# Altium PCB CZ201C_V2.0.PcbDoc (part 2 of 2)
Units mm, origin at the board's own origin, x right, y up, seen from the top; angles counter-clockwise.
Board outline 73 x 60 mm, 2 copper layers (Top Layer, Bottom Layer); 64 components, 36 nets, 200 pads, 72 vias.
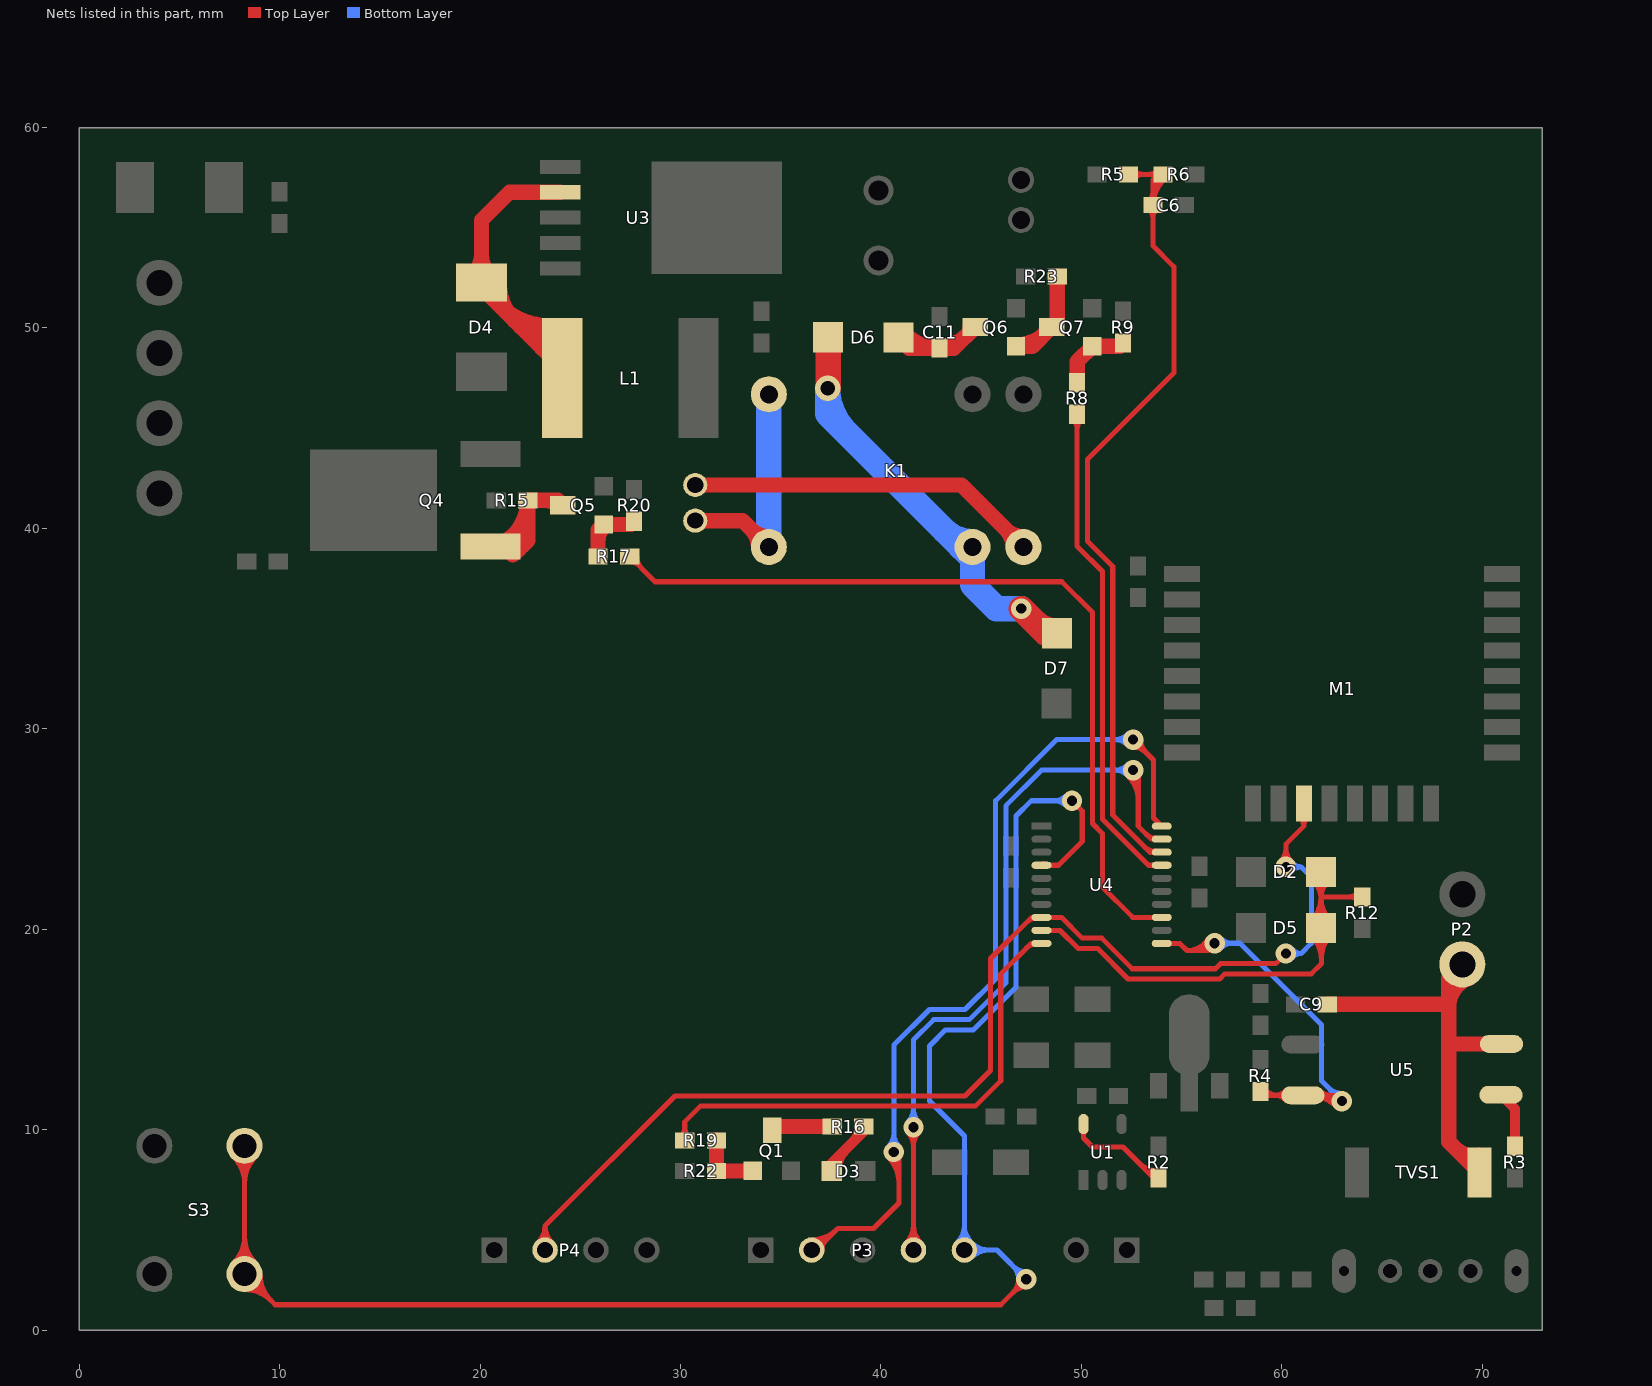
[diagram p2: the nets of this part, all layers, seen from the top]

## Via types
v1: diameter 1.016, hole 0.508, Top Layer to Bottom Layer, 69 vias
v2: diameter 1.27, hole 0.711, Top Layer to Bottom Layer, 3 vias

## Nets (pads, with @x,y where several pads share a name; then routed paths per layer and width w, separated by ;. In a path a pad name is that pad's centre, name@x,y a point inside that pad or via, vN(x,y) a via of type N, cw(c..) or ccw(c..) an arc to the next point about the centre after c; other vN are vias at no path point) (continued)
LED1: R19.2 U4.10 | length 30.9
  Top Layer w0.254: R19.2@30.21,9.472 30.21,10.398 30.988,11.176 44.704,11.176 45.974,12.446 45.974,17.78 47.49,19.296 U4.10@48.006,19.296 ; R19.2@30.017,9.665 ccw(c29.551,10.131) 30.21,10.131 ; R19.2@30.017,9.665 ccw(c29.551,10.131) 30.21,10.131 ; R19.2@30.017,9.665 ccw(c29.551,10.131) 30.21,10.131 ; 30.21,10.131 ccw(c30.869,10.131) R19.2@30.403,9.665 ; 30.21,10.131 ccw(c30.869,10.131) R19.2@30.403,9.665 ; 30.21,10.131 ccw(c30.869,10.131) R19.2@30.403,9.665 ; 47.273,19.079 cw(c47.681,18.671) U4.10@47.681,19.248 ; 47.273,19.079 cw(c47.681,18.671) U4.10@47.681,19.248 ; 47.273,19.079 cw(c47.681,18.671) U4.10@47.681,19.248 ; 47.395,19.201 cw(c47.566,19.029) U4.10@47.662,19.252 ; 47.395,19.201 cw(c47.566,19.029) U4.10@47.662,19.252 ; 47.395,19.201 cw(c47.566,19.029) U4.10@47.662,19.252
LIGHT_CTR: R17.1 U4.13 | length 44.9
  Top Layer w0.254: R17.1@27.46,38.608 28.73,37.338 49.022,37.338 50.546,35.814 50.546,25.277 51.054,24.769 51.054,22.098 52.556,20.596 U4.13@54.006,20.596 U4.13@53.984,20.574 ; R17.1@27.54,38.335 cw(c27.54,37.869) 27.869,38.199 ; R17.1@27.54,38.335 cw(c27.54,37.869) 27.869,38.199 ; R17.1@27.54,38.335 cw(c27.54,37.869) 27.869,38.199 ; R17.1@27.813,38.608 ccw(c28.665,38.608) 28.063,38.005 ; R17.1@27.813,38.608 ccw(c28.665,38.608) 28.063,38.005 ; R17.1@27.813,38.608 ccw(c28.665,38.608) 28.063,38.005
LOCK_CTR: R8.2 U4.17 | length 27.7
  Top Layer w0.254: R8.2@49.784,45.692 49.784,39.116 51.054,37.846 51.054,25.487 53.345,23.196 U4.17@54.006,23.196 ; R8.2@49.591,45.419 cw(c49.125,44.953) 49.784,44.953 ; R8.2@49.591,45.419 cw(c49.125,44.953) 49.784,44.953 ; R8.2@49.591,45.419 cw(c49.125,44.953) 49.784,44.953 ; 49.784,44.953 cw(c50.443,44.953) R8.2@49.977,45.419 ; 49.784,44.953 cw(c50.443,44.953) R8.2@49.977,45.419 ; 49.784,44.953 cw(c50.443,44.953) R8.2@49.977,45.419
LOCK_KEY: R4.1 U4.11 U5.4 | length 51.8
  Top Layer w0.254: U4.11@54.006,19.296 54.907,19.296 55.263,18.941 ; v1(56.642,19.304) 56.279,18.941 55.263,18.941 ; R4.1@58.928,11.91 59.121,11.717 U5.4@61.047,11.717 61.214,11.717 v1@62.705,11.717 ; R4.1@58.928,12.164 R4.1@59.055,12.037 ; 55.263,18.941 ccw(c55.263,20.21) v1@56.324,19.513 ; 55.263,18.941 ccw(c55.263,20.21) v1@56.324,19.513 ; 55.263,18.941 ccw(c55.263,20.21) v1@56.324,19.513 ; 55.733,18.941 ccw(c55.733,19.901) v1@56.536,19.374 ; 55.733,18.941 ccw(c55.733,19.901) v1@56.536,19.374 ; 55.733,18.941 ccw(c55.733,19.901) v1@56.536,19.374 ; 56.204,18.941 ccw(c56.204,19.592) v1@56.748,19.234 ; 56.204,18.941 ccw(c56.204,19.592) v1@56.748,19.234 ; 56.204,18.941 ccw(c56.204,19.592) v1@56.748,19.234 ; R4.1@59.121,11.637 cw(c59.315,11.443) R4.1@59.315,11.717 ; R4.1@59.121,11.637 cw(c59.315,11.443) R4.1@59.315,11.717 ; R4.1@59.121,11.637 cw(c59.315,11.443) R4.1@59.315,11.717 ; R4.1@59.121,12.023 ccw(c59.859,12.761) 59.859,11.717 ; R4.1@59.121,12.023 ccw(c59.859,12.761) 59.859,11.717 ; R4.1@59.121,12.023 ccw(c59.859,12.761) 59.859,11.717 ; 59.645,11.717 ccw(c59.645,12.484) U5.4@60.187,11.942 ; 59.645,11.717 cw(c59.645,10.951) U5.4@60.187,11.493 ; 59.645,11.717 ccw(c59.645,12.484) U5.4@60.187,11.942 ; 59.645,11.717 cw(c59.645,10.951) U5.4@60.187,11.493 ; 59.645,11.717 ccw(c59.645,12.484) U5.4@60.187,11.942 ; 59.645,11.717 cw(c59.645,10.951) U5.4@60.187,11.493 ; U5.4@61.379,11.717 cw(c61.379,9.817) v1@62.723,11.161 ; U5.4@61.379,11.717 cw(c61.379,9.817) v1@62.723,11.161 ; U5.4@61.379,11.717 cw(c61.379,9.817) v1@62.723,11.161 ; U5.4@61.907,11.493 cw(c62.449,10.951) 62.449,11.717 ; U5.4@61.907,11.493 cw(c62.449,10.951) 62.449,11.717 ; U5.4@61.907,11.493 cw(c62.449,10.951) 62.449,11.717 ; U5.4@61.907,11.942 ccw(c62.449,12.484) 62.449,11.717 ; U5.4@61.907,11.942 ccw(c62.449,12.484) 62.449,11.717 ; U5.4@61.907,11.942 ccw(c62.449,12.484) 62.449,11.717 ; U5.4@61.992,11.717 cw(c61.992,10.43) v1@62.902,11.34 ; U5.4@61.992,11.717 cw(c61.992,10.43) v1@62.902,11.34 ; U5.4@61.992,11.717 cw(c61.992,10.43) v1@62.902,11.34
  Bottom Layer w0.254: v1(56.642,19.304) 57.912,19.304 61.976,15.24 61.976,12.446 v1(62.992,11.43) ; v1@56.911,19.035 cw(c57.562,18.384) 57.562,19.304 ; v1@56.911,19.035 cw(c57.562,18.384) 57.562,19.304 ; v1@56.911,19.035 cw(c57.562,18.384) 57.562,19.304 ; v1@56.911,19.573 ccw(c57.562,20.224) 57.562,19.304 ; v1@56.911,19.573 ccw(c57.562,20.224) 57.562,19.304 ; v1@56.911,19.573 ccw(c57.562,20.224) 57.562,19.304 ; 62.342,12.08 ccw(c62.992,12.731) 62.992,11.811 cw(c62.992,12.731) 62.342,12.08 ; 62.342,12.08 cw(c61.691,11.43) 62.611,11.43 ccw(c61.691,11.43) 62.342,12.08
LOCK_KEY_IN: C9.1 P2.1 TVS1.K U5.2 | length 32.9
  Top Layer w0.762: C9.1@62.258,16.256 68.326,16.256 ; P2.1@69,18.25 68.326,17.576 68.326,16.256 ; TVS1.K@69.852,7.874 68.326,9.4 68.326,14.224 ; U5.2@70.953,14.283 68.385,14.283 68.326,14.224 ; 68.326,14.224 68.326,16.256 ; 68.326,16.145 cw(c69.814,16.145) P2.1@69.277,17.533 ; 68.326,16.145 cw(c69.814,16.145) P2.1@69.277,17.533 ; 68.326,16.145 cw(c69.814,16.145) P2.1@69.277,17.533 ; 68.326,17.257 cw(c69.384,17.257) P2.1@69.003,18.243 ; 68.326,17.257 cw(c69.384,17.257) P2.1@69.003,18.243 ; 68.326,17.257 cw(c69.384,17.257) P2.1@69.003,18.243 ; 68.651,9.075 ccw(c69.536,9.96) TVS1.K@69.805,8.738 ; 68.651,9.075 ccw(c69.536,9.96) TVS1.K@69.805,8.738 ; 68.651,9.075 ccw(c69.536,9.96) TVS1.K@69.805,8.738
NetC11_1: C11.1 D6.A Q6.3 | length 16.6
  Top Layer w0.762: D6.A@40.866,49.522 41.394,48.994 C11.1@42.926,48.994 ; Q6.3@44.704,50.051 43.647,48.994 C11.1@42.926,48.994 ; D6.A@41.136,49.774 ccw(c42.926,51.438) C11.1@42.926,48.994 ; D6.A@41.136,49.774 ccw(c42.926,51.438) C11.1@42.926,48.994 ; D6.A@41.136,49.774 ccw(c42.926,51.438) C11.1@42.926,48.994 ; C11.1@42.926,49.093 ccw(c42.926,51.073) Q6.3@44.326,49.673 ; C11.1@42.926,49.093 ccw(c42.926,51.073) Q6.3@44.326,49.673 ; C11.1@42.926,49.093 ccw(c42.926,51.073) Q6.3@44.326,49.673 ; Q6.3@44.27,49.617 ccw(c43.837,50.051) Q6.3@44.45,50.051 ; Q6.3@44.27,49.617 ccw(c43.837,50.051) Q6.3@44.45,50.051 ; Q6.3@44.27,49.617 ccw(c43.837,50.051) Q6.3@44.45,50.051
NetD3_K: D3.K R16.2 | length 7.7
  Top Layer w0.508: D3.K@37.54,7.94 37.54,8.325 39.168,9.954 R16.2@39.168,9.972 ; 38.595,9.381 ccw(c37.816,10.16) R16.2@38.918,10.16 ; 38.595,9.381 ccw(c37.816,10.16) R16.2@38.918,10.16 ; 38.595,9.381 ccw(c37.816,10.16) R16.2@38.918,10.16 ; D3.K@37.794,7.94 cw(c39.337,7.94) 38.246,9.031 ccw(c39.337,7.94) D3.K@37.794,7.94
NetD4_K: D4.K L1.1 U3.2 | length 48.6
  Top Layer w0.762: U3.2@24,56.77 21.464,56.77 20.066,55.372 20.066,52.006 24.1,47.972 L1.1@24.1,47.5 ; D4.K@19.662,52.665 ccw(c18.686,53.64) 20.066,53.64 ; D4.K@19.662,52.665 ccw(c18.686,53.64) 20.066,53.64 ; D4.K@19.662,52.665 ccw(c18.686,53.64) 20.066,53.64 ; 20.066,53.64 ccw(c21.446,53.64) D4.K@20.47,52.665 ; 20.066,53.64 ccw(c21.446,53.64) D4.K@20.47,52.665 ; 20.066,53.64 ccw(c21.446,53.64) D4.K@20.47,52.665 ; 20.83,51.243 ccw(c23.607,54.02) L1.1@24.033,50.115 ; 20.83,51.243 ccw(c23.607,54.02) L1.1@24.033,50.115 ; 20.83,51.243 ccw(c23.607,54.02) L1.1@24.033,50.115 ; D4.K@20.955,52.261 ccw(c23.714,52.261) 21.763,50.309 ; D4.K@20.955,52.261 ccw(c23.714,52.261) 21.763,50.309 ; D4.K@20.955,52.261 ccw(c23.714,52.261) 21.763,50.309 ; 21.954,50.119 ccw(c23.828,51.993) L1.1@24.115,49.358 ; 21.954,50.119 ccw(c23.828,51.993) L1.1@24.115,49.358 ; 21.954,50.119 ccw(c23.828,51.993) L1.1@24.115,49.358 ; 23.078,48.995 ccw(c24.049,49.966) L1.1@24.198,48.6 ; 23.078,48.995 ccw(c24.049,49.966) L1.1@24.198,48.6 ; 23.078,48.995 ccw(c24.049,49.966) L1.1@24.198,48.6 ; L1.1@24.202,47.871 ccw(c24.27,47.939) L1.1@24.281,47.843 ; L1.1@24.202,47.871 ccw(c24.27,47.939) L1.1@24.281,47.843 ; L1.1@24.202,47.871 ccw(c24.27,47.939) L1.1@24.281,47.843
NetD6_K: D6.K D7.K K1.4 | length 33.5
  Top Layer w1.27: v2(37.338,46.99) 37.366,47.018 D6.K@37.366,49.538 ; v1(47,36) 48.23,34.77 D7.K@48.776,34.77 ; 47.648,35.352 ccw(c48.776,36.48) 48.776,34.885 cw(c48.776,36.48) 47.648,35.352
  Bottom Layer w1.27: v1(47,36) 45.75,36 44.564,37.186 44.564,38.494 43.987,39.071 37.338,45.72 v2(37.338,46.99) ; v2(37.338,46.99) ccw(c40.404,46.99) 38.236,44.822 ; v2(37.338,46.99) ccw(c40.404,46.99) 38.236,44.822 ; v2(37.338,46.99) ccw(c40.404,46.99) 38.236,44.822 ; 43.127,39.931 ccw(c44.564,41.369) 44.564,39.336 cw(c44.564,41.369) 43.127,39.931
NetQ1_1: Q1.1 R19.1 R22.2 | length 3.3
  Top Layer w0.762: R19.1@31.79,9.472 R22.2@31.79,7.948 Q1.1@33.603,7.948
NetQ1_3: Q1.3 R16.1 | length 3.1
  Top Layer w0.762: Q1.3@34.568,9.98 34.748,10.16 R16.1@37.564,10.16
NetQ4_1: Q4.1 Q5.3 R15.1 | length 23.3
  Top Layer w0.762: Q4.1@20.517,39.102 22.084,39.102 22.38,39.398 ; Q5.3@24.13,41.161 23.889,41.402 R15.1@22.38,41.402 ; Q4.1@21.225,39.331 ccw(c19.945,41.402) R15.1@22.38,41.402 ; Q4.1@21.225,39.331 ccw(c19.945,41.402) R15.1@22.38,41.402 ; Q4.1@21.225,39.331 ccw(c19.945,41.402) R15.1@22.38,41.402 ; Q4.1@21.521,39.322 ccw(c21.905,39.873) 22.38,39.398 ; Q4.1@21.521,39.322 ccw(c21.905,39.873) 22.38,39.398 ; Q4.1@21.521,39.322 ccw(c21.905,39.873) 22.38,39.398 ; Q4.1@21.626,38.683 ccw(c20.79,40.035) 22.38,40.035 ; Q4.1@21.626,38.683 ccw(c20.79,40.035) 22.38,40.035 ; Q4.1@21.626,38.683 ccw(c20.79,40.035) 22.38,40.035 ; 22.38,39.398 R15.1@22.38,41.402 ; 23.186,41.402 cw(c23.186,40.394) Q5.3@23.898,41.107 ; 23.186,41.402 cw(c23.186,40.394) Q5.3@23.898,41.107 ; 23.186,41.402 cw(c23.186,40.394) Q5.3@23.898,41.107
NetQ5_1: Q5.1 R17.2 R20.2 | length 6
  Top Layer w0.762: R17.2@25.88,38.608 25.88,39.913 Q5.1@26.162,40.195 27.524,40.195 R20.2@27.686,40.358 ; 25.88,39.331 cw(c27.027,39.331) Q5.1@26.216,40.142 ; 25.88,39.331 cw(c27.027,39.331) Q5.1@26.216,40.142 ; 25.88,39.331 cw(c27.027,39.331) Q5.1@26.216,40.142
NetQ6_1: Q6.1 Q7.3 R23.1 | length 11.3
  Top Layer w0.762: Q6.1@46.736,49.085 47.549,49.085 Q7.3@48.514,50.051 48.796,50.333 R23.1@48.796,52.578 ; Q6.1@46.736,49.162 ccw(c46.736,51.308) Q7.3@48.254,49.79 ; Q6.1@46.736,49.162 ccw(c46.736,51.308) Q7.3@48.254,49.79 ; Q6.1@46.736,49.162 ccw(c46.736,51.308) Q7.3@48.254,49.79 ; Q7.3@48.08,49.617 ccw(c47.647,50.051) Q7.3@48.26,50.051 ; Q7.3@48.08,49.617 ccw(c47.647,50.051) Q7.3@48.26,50.051 ; Q7.3@48.08,49.617 ccw(c47.647,50.051) Q7.3@48.26,50.051
NetQ7_1: Q7.1 R8.1 R9.2 | length 3.7
  Top Layer w0.762: R8.1@49.784,47.272 49.784,48.323 Q7.1@50.546,49.085 51.908,49.085 R9.2@52.07,49.248
NetR2_2: R2.2 U1.5 | length 11.9
  Top Layer w0.254: U1.5@50.104,10.287 50.104,9.586 50.546,9.144 52.07,9.144 53.622,7.592 R2.2@53.848,7.592 ; U1.5@50.014,9.943 cw(c49.797,9.726) 50.104,9.726 ; U1.5@50.014,9.943 cw(c49.797,9.726) 50.104,9.726 ; U1.5@50.014,9.943 cw(c49.797,9.726) 50.104,9.726 ; 50.104,9.726 cw(c50.411,9.726) U1.5@50.194,9.943 ; 50.104,9.726 cw(c50.411,9.726) U1.5@50.194,9.943 ; 50.104,9.726 cw(c50.411,9.726) U1.5@50.194,9.943 ; 52.86,8.354 ccw(c53.848,9.343) R2.2@53.848,7.945 ; 52.86,8.354 ccw(c53.848,9.343) R2.2@53.848,7.945 ; 52.86,8.354 ccw(c53.848,9.343) R2.2@53.848,7.945 ; 53.293,7.921 ccw(c53.848,8.476) R2.2@53.848,7.691 ; 53.293,7.921 ccw(c53.848,8.476) R2.2@53.848,7.691 ; 53.293,7.921 ccw(c53.848,8.476) R2.2@53.848,7.691
NetR3_1: R3.1 U5.1 | length 2.9
  Top Layer w0.508: U5.1@70.928,11.743 71.628,11.042 R3.1@71.628,9.172
NRST: P3.5 S3.1 S3.4 U4.4 | length 151.9
  Top Layer w0.254: S3.1@8.25,9.2 S3.4@8.25,2.8 9.78,1.27 45.974,1.27 v1(47.244,2.54) ; U4.4@48.1,23.29 U4.4@48.006,23.196 48.85,23.196 50.038,24.384 50.038,25.908 v1(49.53,26.416) ; S3.4@7.703,3.347 ccw(c6.384,4.666) 8.25,4.666 ; S3.4@7.703,3.347 ccw(c6.384,4.666) 8.25,4.666 ; S3.4@7.703,3.347 ccw(c6.384,4.666) 8.25,4.666 ; S3.1@7.703,8.653 cw(c6.384,7.334) 8.25,7.334 ; S3.1@7.703,8.653 cw(c6.384,7.334) 8.25,7.334 ; S3.1@7.703,8.653 cw(c6.384,7.334) 8.25,7.334 ; S3.4@7.883,3.167 ccw(c6.997,4.053) 8.25,4.053 ; S3.4@7.883,3.167 ccw(c6.997,4.053) 8.25,4.053 ; S3.4@7.883,3.167 ccw(c6.997,4.053) 8.25,4.053 ; S3.1@7.883,8.833 cw(c6.997,7.947) 8.25,7.947 ; S3.1@7.883,8.833 cw(c6.997,7.947) 8.25,7.947 ; S3.1@7.883,8.833 cw(c6.997,7.947) 8.25,7.947 ; S3.4@8.25,2.027 cw(c8.25,0.161) 9.57,1.48 ; S3.4@8.25,2.027 cw(c8.25,0.161) 9.57,1.48 ; S3.4@8.25,2.027 cw(c8.25,0.161) 9.57,1.48 ; S3.4@8.25,2.281 cw(c8.25,1.028) 9.136,1.914 ; S3.4@8.25,2.281 cw(c8.25,1.028) 9.136,1.914 ; S3.4@8.25,2.281 cw(c8.25,1.028) 9.136,1.914 ; 8.25,4.053 ccw(c9.503,4.053) S3.4@8.617,3.167 ; 8.25,4.053 ccw(c9.503,4.053) S3.4@8.617,3.167 ; 8.25,4.053 ccw(c9.503,4.053) S3.4@8.617,3.167 ; 8.25,4.666 ccw(c10.116,4.666) S3.4@8.797,3.347 ; 8.25,4.666 ccw(c10.116,4.666) S3.4@8.797,3.347 ; 8.25,4.666 ccw(c10.116,4.666) S3.4@8.797,3.347 ; 8.25,7.334 cw(c10.116,7.334) S3.1@8.797,8.653 ; 8.25,7.334 cw(c10.116,7.334) S3.1@8.797,8.653 ; 8.25,7.334 cw(c10.116,7.334) S3.1@8.797,8.653 ; 8.25,7.947 cw(c9.503,7.947) S3.1@8.617,8.833 ; 8.25,7.947 cw(c9.503,7.947) S3.1@8.617,8.833 ; 8.25,7.947 cw(c9.503,7.947) S3.1@8.617,8.833 ; S3.4@8.769,2.8 ccw(c10.022,2.8) 9.136,1.914 ; S3.4@8.769,2.8 ccw(c10.022,2.8) 9.136,1.914 ; S3.4@8.769,2.8 ccw(c10.022,2.8) 9.136,1.914 ; S3.4@9.023,2.8 ccw(c10.889,2.8) 9.57,1.48 ; S3.4@9.023,2.8 ccw(c10.889,2.8) 9.57,1.48 ; S3.4@9.023,2.8 ccw(c10.889,2.8) 9.57,1.48 ; 46.594,1.89 ccw(c45.943,2.54) v1@46.863,2.54 ; 46.594,1.89 cw(c47.244,1.239) v1@47.244,2.159 ; 46.594,1.89 ccw(c45.943,2.54) v1@46.863,2.54 ; 46.594,1.89 cw(c47.244,1.239) v1@47.244,2.159 ; 46.594,1.89 ccw(c45.943,2.54) v1@46.863,2.54 ; 46.594,1.89 cw(c47.244,1.239) v1@47.244,2.159
  Bottom Layer w0.254: v1(47.244,2.54) 45.784,4 P3.5@44.16,4 44.16,9.688 42.418,11.43 42.418,12.192 42.42,12.194 42.42,14.182 43.224,14.986 44.617,14.986 46.736,17.105 46.736,25.654 47.498,26.416 v1(49.53,26.416) ; P3.5@43.801,4.359 ccw(c42.934,5.226) 44.16,5.226 ; P3.5@43.801,4.359 ccw(c42.934,5.226) 44.16,5.226 ; P3.5@43.801,4.359 ccw(c42.934,5.226) 44.16,5.226 ; 44.16,5.226 ccw(c45.386,5.226) P3.5@44.519,4.359 ; 44.16,5.226 ccw(c45.386,5.226) P3.5@44.519,4.359 ; 44.16,5.226 ccw(c45.386,5.226) P3.5@44.519,4.359 ; P3.5@44.519,3.641 cw(c45.386,2.774) 45.386,4 ; P3.5@44.519,3.641 cw(c45.386,2.774) 45.386,4 ; P3.5@44.519,3.641 cw(c45.386,2.774) 45.386,4 ; P3.5@44.519,4.359 ccw(c45.386,5.226) 45.386,4 ; P3.5@44.519,4.359 ccw(c45.386,5.226) 45.386,4 ; P3.5@44.519,4.359 ccw(c45.386,5.226) 45.386,4 ; 46.594,3.19 ccw(c47.244,3.841) v1@47.244,2.921 ; 46.594,3.19 cw(c45.943,2.54) v1@46.863,2.54 ; 46.594,3.19 ccw(c47.244,3.841) v1@47.244,2.921 ; 46.594,3.19 cw(c45.943,2.54) v1@46.863,2.54 ; 46.594,3.19 ccw(c47.244,3.841) v1@47.244,2.921 ; 46.594,3.19 cw(c45.943,2.54) v1@46.863,2.54 ; 48.61,26.416 ccw(c48.61,27.336) v1@49.261,26.685 ; 48.61,26.416 cw(c48.61,25.496) v1@49.261,26.147 ; 48.61,26.416 ccw(c48.61,27.336) v1@49.261,26.685 ; 48.61,26.416 cw(c48.61,25.496) v1@49.261,26.147 ; 48.61,26.416 ccw(c48.61,27.336) v1@49.261,26.685 ; 48.61,26.416 cw(c48.61,25.496) v1@49.261,26.147
PWR_STATE: C6.1 R5.1 R6.2 U4.18 | length 67.3
  Top Layer w0.254: R5.1@52.352,57.658 R6.2@54.074,57.658 53.566,57.15 C6.1@53.566,56.134 53.566,54.102 54.61,53.058 54.61,47.752 50.292,43.434 50.292,39.37 51.562,38.1 51.562,25.698 52.854,24.406 ; 53.32,23.94 52.854,24.406 ; U4.18@54.006,23.846 53.414,23.846 52.854,24.406 ; R5.1@52.625,57.465 cw(c53.091,56.999) 53.091,57.658 ; R5.1@52.625,57.465 cw(c53.091,56.999) 53.091,57.658 ; R5.1@52.625,57.465 cw(c53.091,56.999) 53.091,57.658 ; R5.1@52.625,57.851 ccw(c53.091,58.317) 53.091,57.658 ; R5.1@52.625,57.851 ccw(c53.091,58.317) 53.091,57.658 ; R5.1@52.625,57.851 ccw(c53.091,58.317) 53.091,57.658 ; 53.143,24.117 ccw(c53.681,24.655) U4.18@53.681,23.894 ; 53.143,24.117 ccw(c53.681,24.655) U4.18@53.681,23.894 ; 53.143,24.117 ccw(c53.681,24.655) U4.18@53.681,23.894 ; 53.335,57.658 ccw(c53.335,58.317) R6.2@53.801,57.851 ; 53.335,57.658 cw(c53.335,56.999) R6.2@53.801,57.465 ; 53.335,57.658 ccw(c53.335,58.317) R6.2@53.801,57.851 ; 53.335,57.658 cw(c53.335,56.999) R6.2@53.801,57.465 ; 53.335,57.658 ccw(c53.335,58.317) R6.2@53.801,57.851 ; 53.335,57.658 cw(c53.335,56.999) R6.2@53.801,57.465 ; C6.1@53.373,55.941 cw(c52.907,55.475) 53.566,55.475 ; C6.1@53.373,55.941 cw(c52.907,55.475) 53.566,55.475 ; C6.1@53.373,55.941 cw(c52.907,55.475) 53.566,55.475 ; C6.1@53.373,56.327 ccw(c52.907,56.793) 53.566,56.793 ; C6.1@53.373,56.327 ccw(c52.907,56.793) 53.566,56.793 ; C6.1@53.373,56.327 ccw(c52.907,56.793) 53.566,56.793 ; 53.566,55.475 cw(c54.225,55.475) C6.1@53.759,55.941 ; 53.566,55.475 cw(c54.225,55.475) C6.1@53.759,55.941 ; 53.566,55.475 cw(c54.225,55.475) C6.1@53.759,55.941 ; C6.1@53.566,56.075 cw(c55.431,56.075) R6.2@54.177,57.456 ; C6.1@53.566,56.075 cw(c55.431,56.075) R6.2@54.177,57.456 ; C6.1@53.566,56.075 cw(c55.431,56.075) R6.2@54.177,57.456 ; 53.566,56.649 cw(c54.91,56.649) R6.2@54.007,57.644 ; 53.566,56.649 cw(c54.91,56.649) R6.2@54.007,57.644 ; 53.566,56.649 cw(c54.91,56.649) R6.2@54.007,57.644 ; 53.566,56.793 ccw(c54.225,56.793) C6.1@53.759,56.327 ; 53.566,56.793 ccw(c54.225,56.793) C6.1@53.759,56.327 ; 53.566,56.793 ccw(c54.225,56.793) C6.1@53.759,56.327 ; 53.566,57.222 cw(c54.39,57.222) R6.2@53.836,57.832 ; 53.566,57.222 cw(c54.39,57.222) R6.2@53.836,57.832 ; 53.566,57.222 cw(c54.39,57.222) R6.2@53.836,57.832 ; 53.606,57.19 ccw(c53.29,57.506) R6.2@53.727,57.601 ; 53.606,57.19 ccw(c53.29,57.506) R6.2@53.727,57.601 ; 53.606,57.19 ccw(c53.29,57.506) R6.2@53.727,57.601 ; 53.665,57.249 cw(c53.994,56.919) R6.2@53.994,57.385 ; 53.665,57.249 cw(c53.994,56.919) R6.2@53.994,57.385 ; 53.665,57.249 cw(c53.994,56.919) R6.2@53.994,57.385
RF_KEY_IN: K1.1 pad.1 | length 17.7
  Top Layer w0.762: pad.1@30.734,40.386 33.089,40.386 K1.1@34.404,39.071 ; 33.518,39.957 ccw(c34.404,40.843) K1.1@34.404,39.59 ; 33.518,39.957 cw(c32.632,39.071) K1.1@33.885,39.071 ; 33.518,39.957 ccw(c34.404,40.843) K1.1@34.404,39.59 ; 33.518,39.957 cw(c32.632,39.071) K1.1@33.885,39.071 ; 33.518,39.957 ccw(c34.404,40.843) K1.1@34.404,39.59 ; 33.518,39.957 cw(c32.632,39.071) K1.1@33.885,39.071
  Bottom Layer w1.27: K1.1@34.404,39.071 K1.1@34.404,46.691
RF_KEY_OUT: K1.3 pad.0 | length 23.6
  Top Layer w0.762: pad.0@30.734,42.164 44.011,42.164 K1.3@47.104,39.071 ; 46.218,39.957 ccw(c47.104,40.843) K1.3@47.104,39.59 ; 46.218,39.957 cw(c45.332,39.071) K1.3@46.585,39.071 ; 46.218,39.957 ccw(c47.104,40.843) K1.3@47.104,39.59 ; 46.218,39.957 cw(c45.332,39.071) K1.3@46.585,39.071 ; 46.218,39.957 ccw(c47.104,40.843) K1.3@47.104,39.59 ; 46.218,39.957 cw(c45.332,39.071) K1.3@46.585,39.071
SWCLK: P3.2 U4.20 | length 71
  Top Layer w0.254: P3.2@36.54,4 36.766,4 37.846,5.08 39.624,5.08 40.894,6.35 v1@40.894,9.144 ; v1(52.578,29.464) 53.594,28.448 53.594,25.558 U4.20@54.006,25.146 ; P3.2@36.54,4.254 ccw(c36.54,5.413) 37.359,4.593 ; P3.2@36.54,4.254 ccw(c36.54,5.413) 37.359,4.593 ; P3.2@36.54,4.254 ccw(c36.54,5.413) 37.359,4.593 ; P3.2@36.54,4.508 ccw(c36.54,6.28) 37.793,5.027 ; P3.2@36.54,4.508 ccw(c36.54,6.28) 37.793,5.027 ; P3.2@36.54,4.508 ccw(c36.54,6.28) 37.793,5.027 ; P3.2@37.048,4 cw(c37.729,4) 37.247,4.481 ; P3.2@37.048,4 cw(c37.729,4) 37.247,4.481 ; P3.2@37.048,4 cw(c37.729,4) 37.247,4.481 ; v1@40.371,8.621 cw(c39.107,7.357) 40.894,7.357 ; v1@40.371,8.621 cw(c39.107,7.357) 40.894,7.357 ; v1@40.371,8.621 cw(c39.107,7.357) 40.894,7.357 ; v1@40.55,8.8 cw(c39.72,7.97) 40.894,7.97 ; v1@40.55,8.8 cw(c39.72,7.97) 40.894,7.97 ; v1@40.55,8.8 cw(c39.72,7.97) 40.894,7.97 ; v1@52.578,29.083 cw(c52.578,28.163) 53.228,28.814 ; v1@52.578,29.083 cw(c52.578,28.163) 53.228,28.814 ; v1@52.578,29.083 cw(c52.578,28.163) 53.228,28.814 ; v1@52.959,29.464 ccw(c53.879,29.464) 53.228,28.814 ; v1@52.959,29.464 ccw(c53.879,29.464) 53.228,28.814 ; v1@52.959,29.464 ccw(c53.879,29.464) 53.228,28.814 ; 53.808,25.344 cw(c53.617,25.153) U4.20@53.886,25.125 ; 53.808,25.344 cw(c53.617,25.153) U4.20@53.886,25.125 ; 53.808,25.344 cw(c53.617,25.153) U4.20@53.886,25.125
  Bottom Layer w0.254: v1(40.64,8.89) 40.64,14.224 42.418,16.002 43.688,16.002 44.196,16.002 45.72,17.526 45.72,26.416 48.768,29.464 v1(52.578,29.464) ; v1@40.371,9.159 ccw(c39.72,9.81) 40.64,9.81 ; v1@40.371,9.159 ccw(c39.72,9.81) 40.64,9.81 ; v1@40.371,9.159 ccw(c39.72,9.81) 40.64,9.81 ; 40.64,9.81 ccw(c41.56,9.81) v1@40.909,9.159 ; 40.64,9.81 ccw(c41.56,9.81) v1@40.909,9.159 ; 40.64,9.81 ccw(c41.56,9.81) v1@40.909,9.159 ; 51.658,29.464 ccw(c51.658,30.384) v1@52.309,29.733 ; 51.658,29.464 cw(c51.658,28.544) v1@52.309,29.195 ; 51.658,29.464 ccw(c51.658,30.384) v1@52.309,29.733 ; 51.658,29.464 cw(c51.658,28.544) v1@52.309,29.195 ; 51.658,29.464 ccw(c51.658,30.384) v1@52.309,29.733 ; 51.658,29.464 cw(c51.658,28.544) v1@52.309,29.195
SWDIO: P3.4 U4.19 | length 64.1
  Top Layer w0.254: P3.4@41.62,4 v1(41.62,10.124) v1@41.91,10.414 ; v1(52.578,27.94) 52.832,27.686 52.832,25.146 53.482,24.496 U4.19@54.006,24.496 ; P3.4@41.261,4.359 ccw(c40.394,5.226) 41.62,5.226 ; P3.4@41.261,4.359 ccw(c40.394,5.226) 41.62,5.226 ; P3.4@41.261,4.359 ccw(c40.394,5.226) 41.62,5.226 ; v1@41.351,9.855 cw(c40.7,9.204) 41.62,9.204 ; v1@41.351,9.855 cw(c40.7,9.204) 41.62,9.204 ; v1@41.351,9.855 cw(c40.7,9.204) 41.62,9.204 ; 41.62,5.226 ccw(c42.846,5.226) P3.4@41.979,4.359 ; 41.62,5.226 ccw(c42.846,5.226) P3.4@41.979,4.359 ; 41.62,5.226 ccw(c42.846,5.226) P3.4@41.979,4.359 ; 41.62,9.204 cw(c42.54,9.204) v1@41.889,9.855 ; 41.62,9.204 cw(c42.54,9.204) v1@41.889,9.855 ; 41.62,9.204 cw(c42.54,9.204) v1@41.889,9.855 ; v1@52.309,27.671 cw(c51.045,26.407) 52.832,26.407 ; v1@52.309,27.671 cw(c51.045,26.407) 52.832,26.407 ; v1@52.309,27.671 cw(c51.045,26.407) 52.832,26.407 ; v1@52.488,27.85 cw(c51.658,27.02) 52.832,27.02 ; v1@52.488,27.85 cw(c51.658,27.02) 52.832,27.02 ; v1@52.488,27.85 cw(c51.658,27.02) 52.832,27.02 ; 53.259,24.719 ccw(c53.681,25.14) U4.19@53.681,24.544 ; 53.259,24.719 ccw(c53.681,25.14) U4.19@53.681,24.544 ; 53.259,24.719 ccw(c53.681,25.14) U4.19@53.681,24.544
  Bottom Layer w0.254: v1(41.62,10.124) 41.62,14.486 42.628,15.494 44.406,15.494 46.228,17.316 46.228,26.162 48.006,27.94 v1(52.578,27.94) ; v1@41.351,10.393 ccw(c40.7,11.044) 41.62,11.044 ; v1@41.351,10.393 ccw(c40.7,11.044) 41.62,11.044 ; v1@41.351,10.393 ccw(c40.7,11.044) 41.62,11.044 ; 41.62,11.044 ccw(c42.54,11.044) v1@41.889,10.393 ; 41.62,11.044 ccw(c42.54,11.044) v1@41.889,10.393 ; 41.62,11.044 ccw(c42.54,11.044) v1@41.889,10.393 ; 51.658,27.94 ccw(c51.658,28.86) v1@52.309,28.209 ; 51.658,27.94 cw(c51.658,27.02) v1@52.309,27.671 ; 51.658,27.94 ccw(c51.658,28.86) v1@52.309,28.209 ; 51.658,27.94 cw(c51.658,27.02) v1@52.309,27.671 ; 51.658,27.94 ccw(c51.658,28.86) v1@52.309,28.209 ; 51.658,27.94 cw(c51.658,27.02) v1@52.309,27.671
UART_RX: D2.A D5.A R12.1 U4.9 | length 52.9
  Top Layer w0.254: U4.9@48.006,19.946 48.932,19.946 49.828,19.05 50.8,19.05 52.324,17.526 56.896,17.526 57.15,17.78 61.468,17.78 61.976,18.288 61.976,20.03 D5.A@61.948,20.058 61.948,21.59 ; D2.A@61.948,22.852 61.948,21.59 ; R12.1@64.008,21.618 61.976,21.618 61.948,21.59 ; D5.A@61.507,19.618 cw(c60.376,18.487) 61.976,18.487 ; D5.A@61.507,19.618 cw(c60.376,18.487) 61.976,18.487 ; D5.A@61.507,19.618 cw(c60.376,18.487) 61.976,18.487 ; D5.A@61.507,20.499 ccw(c60.444,21.562) 61.948,21.562 ; D5.A@61.507,20.499 ccw(c60.444,21.562) 61.948,21.562 ; D5.A@61.507,20.499 ccw(c60.444,21.562) 61.948,21.562 ; D2.A@61.569,22.358 cw(c60.981,21.59) 61.948,21.59 ; D2.A@61.569,22.358 cw(c60.981,21.59) 61.948,21.59 ; D2.A@61.569,22.358 cw(c60.981,21.59) 61.948,21.59 ; D5.A@61.687,19.797 cw(c60.99,19.1) 61.976,19.1 ; D5.A@61.687,19.797 cw(c60.99,19.1) 61.976,19.1 ; D5.A@61.687,19.797 cw(c60.99,19.1) 61.976,19.1 ; D5.A@61.687,20.319 ccw(c61.057,20.949) 61.948,20.949 ; D5.A@61.687,20.319 ccw(c61.057,20.949) 61.948,20.949 ; D5.A@61.687,20.319 ccw(c61.057,20.949) 61.948,20.949 ; 61.948,20.949 ccw(c62.839,20.949) D5.A@62.209,20.319 ; 61.948,20.949 ccw(c62.839,20.949) D5.A@62.209,20.319 ; 61.948,20.949 ccw(c62.839,20.949) D5.A@62.209,20.319 ; 61.948,21.562 ccw(c63.452,21.562) D5.A@62.389,20.499 ; 61.948,21.562 ccw(c63.452,21.562) D5.A@62.389,20.499 ; 61.948,21.562 ccw(c63.452,21.562) D5.A@62.389,20.499 ; 61.948,21.59 cw(c62.915,21.59) D2.A@62.327,22.358 ; 61.948,21.59 cw(c62.915,21.59) D2.A@62.327,22.358 ; 61.948,21.59 cw(c62.915,21.59) D2.A@62.327,22.358 ; 61.976,18.622 cw(c63.384,18.622) D5.A@62.389,19.618 ; 61.976,18.622 cw(c63.384,18.622) D5.A@62.389,19.618 ; 61.976,18.622 cw(c63.384,18.622) D5.A@62.389,19.618 ; 61.976,19.235 cw(c62.771,19.235) D5.A@62.209,19.797 ; 61.976,19.235 cw(c62.771,19.235) D5.A@62.209,19.797 ; 61.976,19.235 cw(c62.771,19.235) D5.A@62.209,19.797 ; 63.349,21.618 ccw(c63.349,22.277) R12.1@63.815,21.811 ; 63.349,21.618 cw(c63.349,20.959) R12.1@63.815,21.425 ; 63.349,21.618 ccw(c63.349,22.277) R12.1@63.815,21.811 ; 63.349,21.618 cw(c63.349,20.959) R12.1@63.815,21.425 ; 63.349,21.618 ccw(c63.349,22.277) R12.1@63.815,21.811 ; 63.349,21.618 cw(c63.349,20.959) R12.1@63.815,21.425
UART_TX: M1.11 P4.2 U4.8 | length 79.5
  Top Layer w0.254: P4.2@23.24,4 23.24,5.206 ; v1(60.198,18.796) 59.69,18.288 56.94,18.288 56.686,18.034 52.534,18.034 51.01,19.558 50.038,19.558 49,20.596 U4.8@48.006,20.596 47.52,20.596 45.466,18.542 45.466,12.954 44.196,11.684 29.718,11.684 23.24,5.206 ; v1(60.198,23.114) 60.198,24.249 61.095,25.146 ; M1.11@61.095,26.284 61.095,25.146 ; P4.2@22.885,4.363 ccw(c22.063,5.206) 23.24,5.206 ; P4.2@22.885,4.363 ccw(c22.063,5.206) 23.24,5.206 ; P4.2@22.885,4.363 ccw(c22.063,5.206) 23.24,5.206 ; 23.24,5.206 ccw(c24.417,5.206) P4.2@23.595,4.363 ; 23.24,5.206 ccw(c24.417,5.206) P4.2@23.595,4.363 ; 23.24,5.206 ccw(c24.417,5.206) P4.2@23.595,4.363 ; 47.324,20.4 cw(c47.681,20.043) U4.8@47.681,20.548 ; 47.324,20.4 cw(c47.681,20.043) U4.8@47.681,20.548 ; 47.324,20.4 cw(c47.681,20.043) U4.8@47.681,20.548 ; v1@59.929,23.383 ccw(c59.278,24.034) 60.198,24.034 ; v1@59.929,23.383 ccw(c59.278,24.034) 60.198,24.034 ; v1@59.929,23.383 ccw(c59.278,24.034) 60.198,24.034 ; 60.198,24.034 ccw(c61.118,24.034) v1@60.467,23.383 ; 60.198,24.034 ccw(c61.118,24.034) v1@60.467,23.383 ; 60.198,24.034 ccw(c61.118,24.034) v1@60.467,23.383 ; M1.11@60.907,25.586 cw(c60.486,25.146) 61.095,25.146 ; M1.11@60.907,25.586 cw(c60.486,25.146) 61.095,25.146 ; M1.11@60.907,25.586 cw(c60.486,25.146) 61.095,25.146 ; 61.095,25.146 cw(c61.704,25.146) M1.11@61.283,25.586 ; 61.095,25.146 cw(c61.704,25.146) M1.11@61.283,25.586 ; 61.095,25.146 cw(c61.704,25.146) M1.11@61.283,25.586
  Bottom Layer w0.254: v1(60.198,18.796) 60.96,18.796 ; v1(60.198,23.114) 60.96,23.114 ; v1@60.503,18.567 cw(c60.96,18.225) 60.96,18.796 ; v1@60.503,18.567 cw(c60.96,18.225) 60.96,18.796 ; v1@60.503,18.567 cw(c60.96,18.225) 60.96,18.796 ; v1@60.503,19.025 ccw(c60.96,19.367) 60.96,18.796 ; v1@60.503,19.025 ccw(c60.96,19.367) 60.96,18.796 ; v1@60.503,19.025 ccw(c60.96,19.367) 60.96,18.796 ; v1@60.503,22.885 cw(c60.96,22.543) 60.96,23.114 ; v1@60.503,22.885 cw(c60.96,22.543) 60.96,23.114 ; v1@60.503,22.885 cw(c60.96,22.543) 60.96,23.114 ; v1@60.503,23.343 ccw(c60.96,23.685) 60.96,23.114 ; v1@60.503,23.343 ccw(c60.96,23.685) 60.96,23.114 ; v1@60.503,23.343 ccw(c60.96,23.685) 60.96,23.114 ; 60.96,18.796 61.468,19.304 61.468,22.606 60.96,23.114
pads on no net: K1.2 M1.3 M1.4 M1.5 M1.6 M1.8 M1.9 M1.12 M1.13 M1.14 M1.15 M1.16 M1.17 M1.18 M1.19 M1.20 M1.21 M1.22 M1.23 M1.24 S4.0 S4.1 U1.1 U4.2 U4.3 U4.6 U4.12 U4.14

## Polygon pours and split planes (outlines as drawn)
GND on Top Layer "Bot Layer-No Net" (solid, remove dead copper, pour order 1000): 0,60 73,60 73,0 0,0 0,60
GND on Bottom Layer "Bot Layer-No Net" (solid, remove dead copper, pour order 1001): 0,60 73,60 73,0 0,0 0,60

## Keep-outs
Keep-Out Layer:
  circle w0.254: c58.8,7.2 r1.6
  circle w0.254: c14.2,7.2 r1.6
  circle w0.254: c58.8,52.8 r1.6
  circle w0.254: c14.2,52.8 r1.6
  lines w0.254: 0,0 73,0 73,60 0,60 0,0

## Other copper
Top Layer:
  region net +12V: 6,59 25.5,59 25.5,58 21,58 20,57 12.5,57 12,56.5 9,56.5 8.5,56 8.5,51.5 12.5,47.5 17,47.5 19.5,45 22,45 22,43 19,43 19,44 18,45 11.5,45 6,50.5
  region net +12V_OUT: 2,46.5 8,46.5 10.5,44 18,44 18,37.5 9.5,37.5 9.5,42 7.5,44 2,44
  region net NetD4_K: 25.5,57.25 21.25,57.25 18.75,54.75 18.75,51 19,50.75 20.75,50.75 23,48.5 23,44.25 25.5,44.25 25.5,50.75 22,50.75 21.5,51.25 21.5,55.75 22,56.25 25.5,56.25
  region net +5V: 23,54.75 26.75,54.75 27.5,54 27.5,52 27.75,51.75 35.25,51.75 36,52.5 36,56.75 37.5,58.25 50.25,58.25 50.25,56.75 46,56.75 45,55.75 38.75,55.75 38,55 38,52.5 35.75,50.25 32.5,50.25 32.25,50 32.25,44.25 28,44.25 27.5,44.75 27.5,50.25 26.25,51.5 26.25,53.25 25.75,53.75 23,53.75
  region net +VIN: 1,59 4.5,59 4.5,54 5,53.5 5,51 1,51
Multi-Layer:
  pour cut-out: 55,60 73,60 73,26 55,26
  pour cut-out: 14.2,49.2 cw(c14.2,52.8) 10.6,52.8 cw(c14.2,52.8) 14.2,56.4 cw(c14.2,52.8) 17.8,52.8 cw(c14.2,52.8)
  pour cut-out: 55.2,52.8 ccw(c58.8,52.8) 58.8,49.2 ccw(c58.8,52.8) 62.4,52.8 ccw(c58.8,52.8) 58.8,56.4 ccw(c58.8,52.8)
  pour cut-out: 10.6,7.2 ccw(c14.2,7.2) 14.2,3.6 ccw(c14.2,7.2) 17.8,7.2 ccw(c14.2,7.2) 14.2,10.8 ccw(c14.2,7.2)
  pour cut-out: 55.2,7.2 ccw(c58.8,7.2) 58.8,3.6 ccw(c58.8,7.2) 62.4,7.2 ccw(c58.8,7.2) 58.8,10.8 ccw(c58.8,7.2)

## Silkscreen, mask and mechanical layers (free items; w line width, h text height)
Top Overlay:
  circle w0.254: c14.2,52.8 r3.6
  circle w0.254: c58.8,52.8 r3.6
  circle w0.254: c14.2,7.2 r3.6
  circle w0.254: c58.8,7.2 r3.6
  circle w0.254: c30.734,42.164 r0.871
  circle w0.254: c30.734,40.386 r0.858
  lines w0.254: 0,62.746 0,63.254 ; 1.524,62.492 0,63 ; 1.524,63.508 0,63 ; 31.301,63 0,63 ; 41.699,63 73,63 ; 71.476,62.492 73,63 ; 71.476,63.508 73,63 ; 73,62.746 73,63.254 ; 75.492,1.524 76,0 ; 75.492,58.476 76,60 ; 75.746,0 76.254,0 ; 75.746,60 76.254,60 ; 76,24.801 76,0 ; 76,35.199 76,60 ; 76.508,1.524 76,0 ; 76.508,58.476 76,60
  text "73 (mm)" at 31.555,61.687 h1.52
  text "CZ201C" at 64.008,55.626 h1.52
  text "V2.0" at 65.024,53.34 h1.52
  text "VIN" at 7.5,51.562 h1.2
  text "GND" at 7.874,48.26 h1.2
  text "+12VO" at 7.874,44.958 h1.2
  text "GND" at 7.874,41.148 h1.2
  text "OUT" at 28.956,37.846 h1.2
  text "60 (mm)" at 77.313,25.055 h1.52 r90